# Altium PCB pcb_micro.PcbDoc
Units mm, origin at the board's own origin, x right, y up, seen from the top; angles counter-clockwise.
Board outline 29.72 x 34.04 mm, 2 copper layers (Top Layer, Bottom Layer); 31 components, 26 nets, 131 pads, 15 vias.
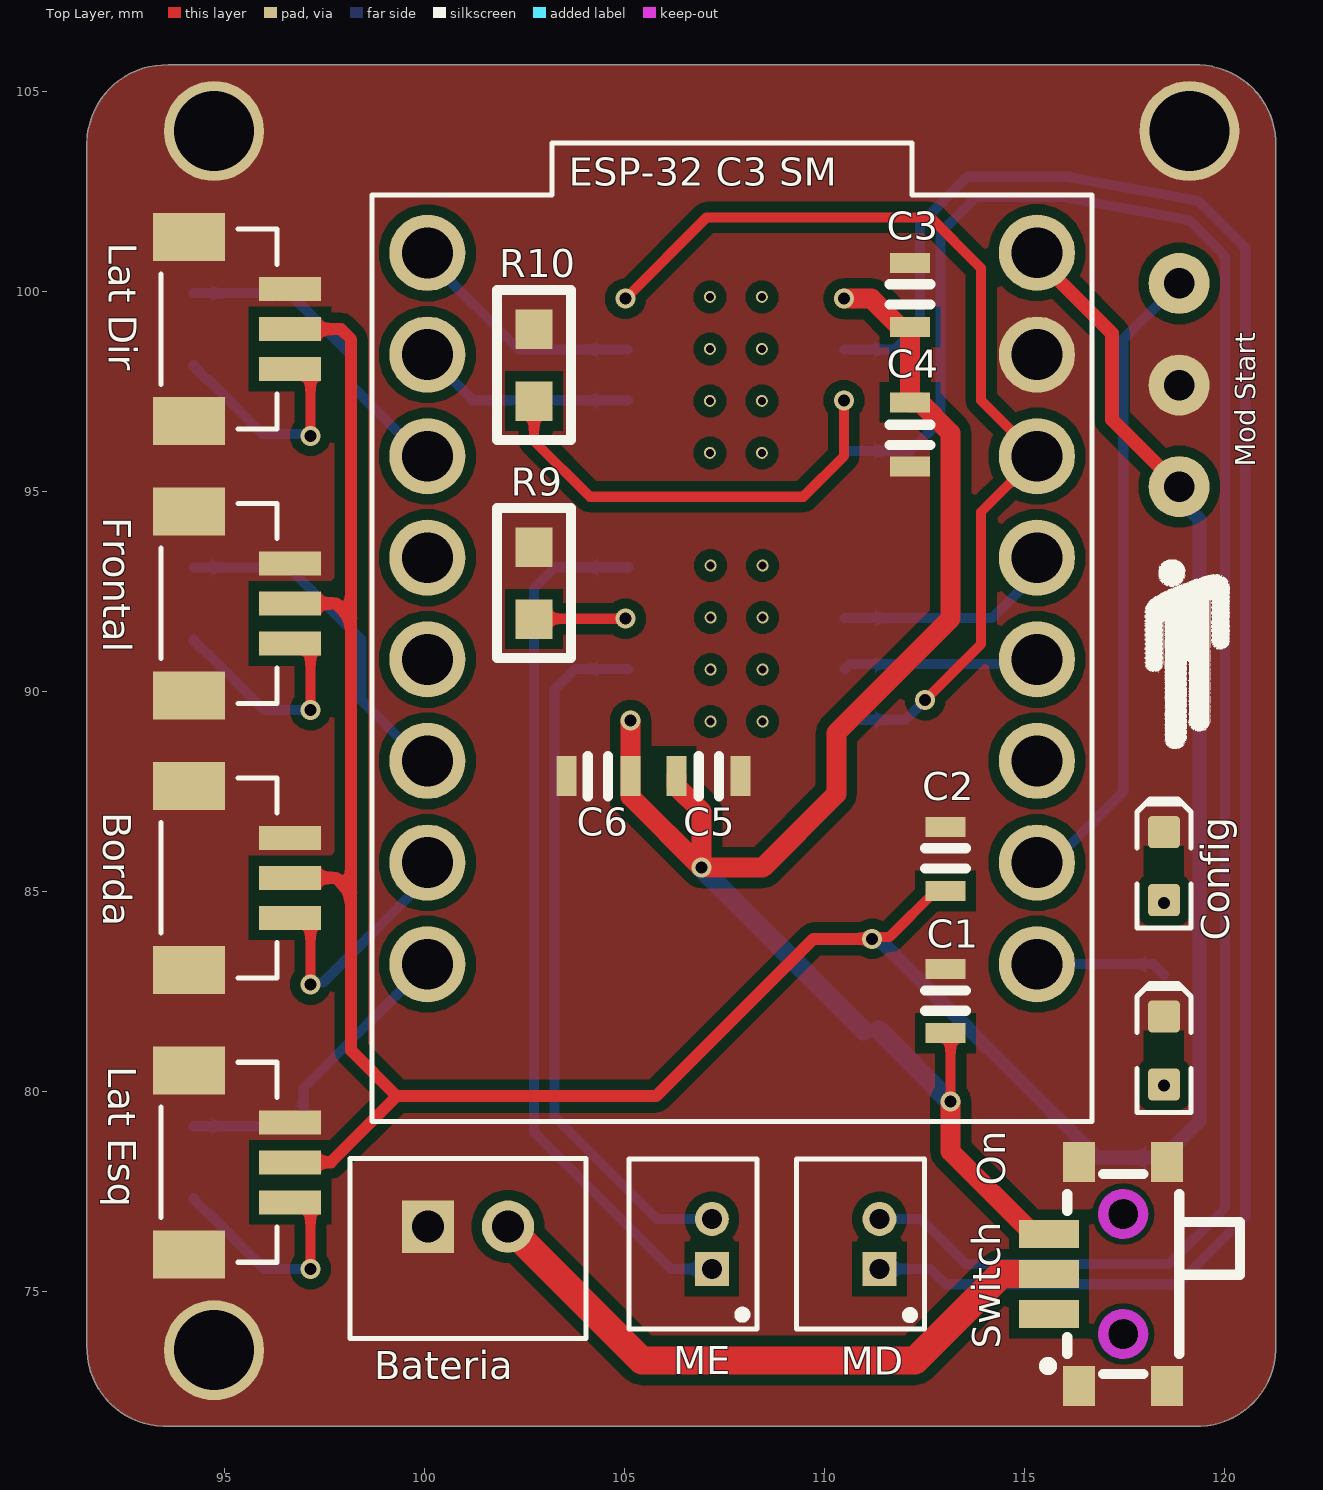
[diagram p0: Top Layer view]
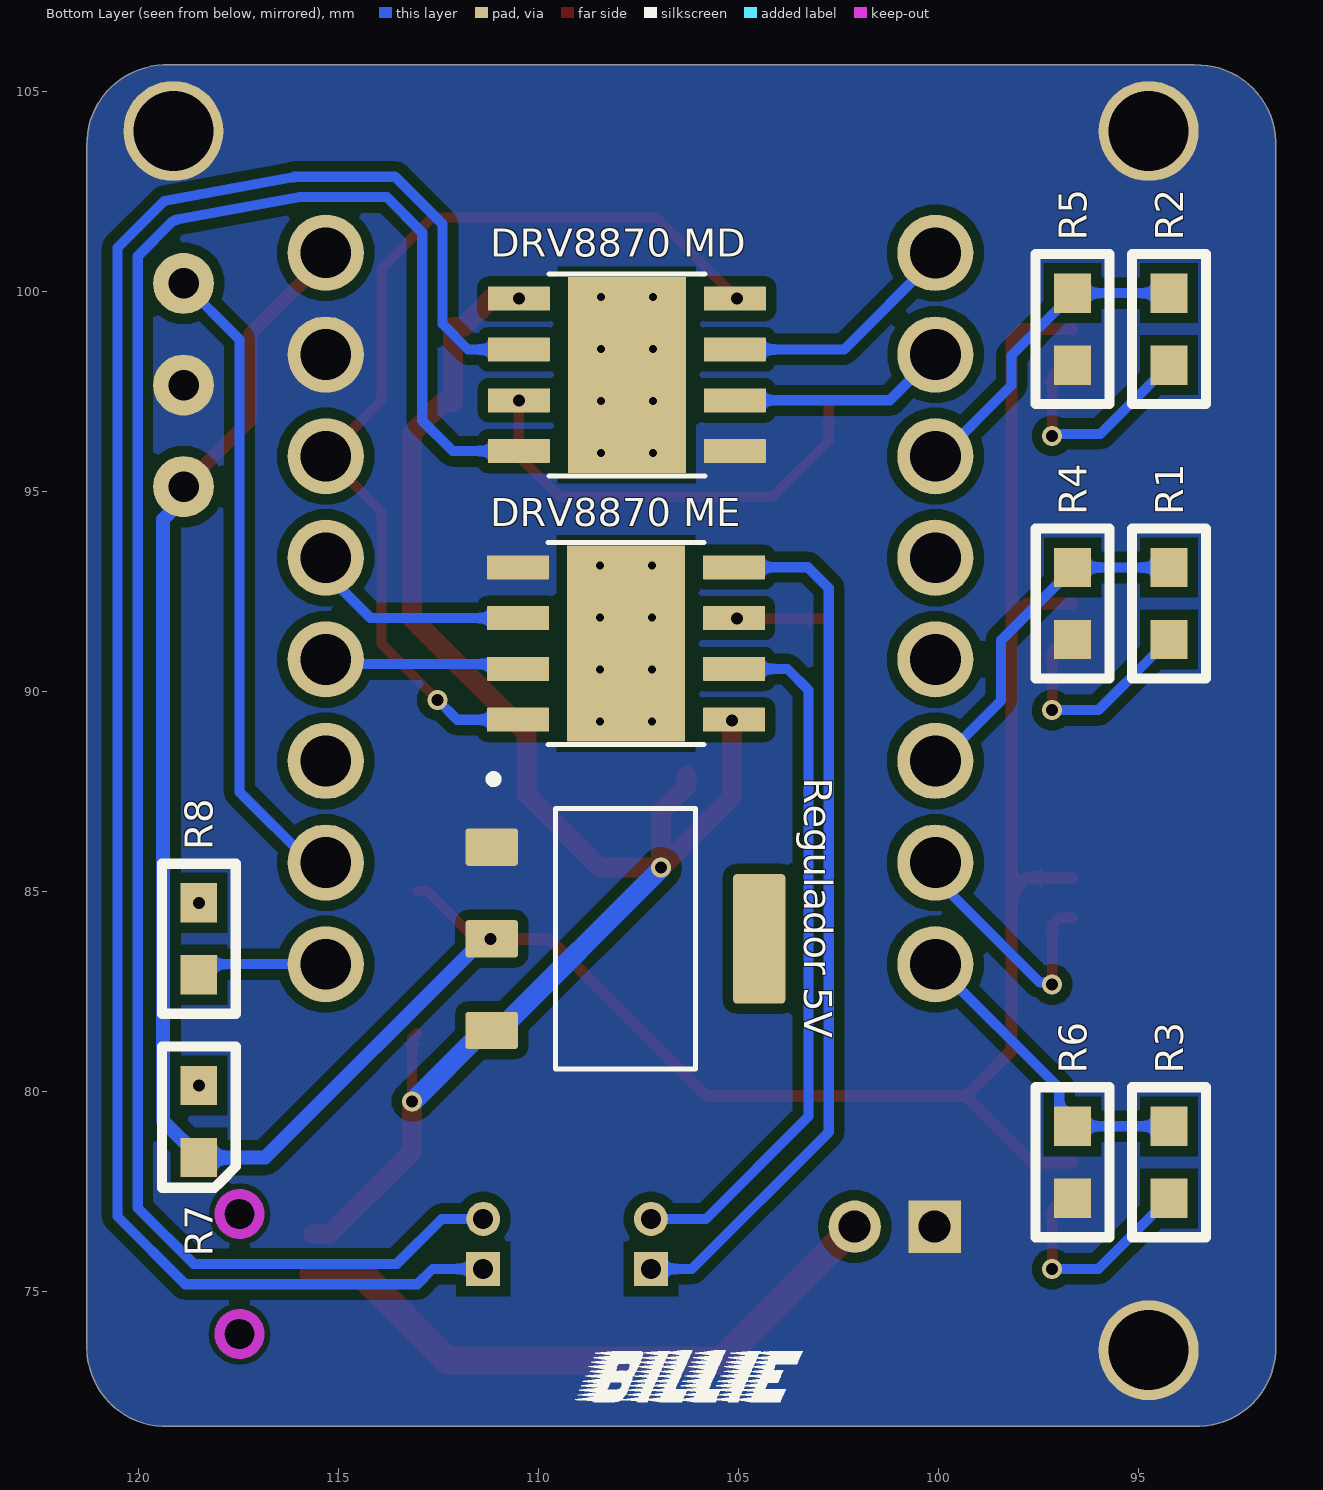
[diagram p1: Bottom Layer view, seen from below]

## Layer stack, top to bottom
Top Solder: solder mask 0.0102, Solder Resist, Dk 3.5
Top Layer: signal copper 0.0356
Dielectric 1: dielectric 0.32, FR-4, Dk 4.8
Bottom Layer: signal copper 0.0356
Bottom Solder: solder mask 0.0102, Solder Resist, Dk 3.5

## Board outline
91.567,73.66 ccw(c93.535,73.596) 93.472,71.628 119.253,71.628 ccw(c119.316,73.596) 121.285,73.533 121.285,103.632 ccw(c119.316,103.696) 119.38,105.664 93.599,105.664 ccw(c93.535,103.696) 91.567,103.759

## Design rules (kind name [scope] priority, off if disabled: settings)
Clearance Clearance_1 [OnMid vs OnMid] p1: gap=0.254 ignorepadtopadclearanceinfootprint=FALSE sourcerule=41 cellrowname=All cellrowtype=0 cellcolname=All cellcoltype=0 innerlayers=TRUE
Clearance Clearance_2 [(ExistsOnLayer('Top Layer') Or ExistsOnLayer('Bottom Layer')) vs (ExistsOnLayer('Top Layer') Or ExistsOnLayer('Bottom Layer'))] p2: gap=0.254 ignorepadtopadclearanceinfootprint=FALSE sourcerule=41 cellrowname=All cellrowtype=0 cellcolname=All cellcoltype=0 outerlayers=TRUE
Clearance [All] p3: gap=0.254 ignorepadtopadclearanceinfootprint=FALSE ismatrix=TRUE
Length MaxMinLength [All] p1: maxlimit=2540 minlimit=0
MinimumSolderMaskSliver [All] p1: minsoldermaskwidth=0.05
PolygonConnect PolygonConnect_4 [All vs IsNamedPolygon('GND_L02_P001')] p1: connectstyle=Direct reliefconductorwidth=0.254 reliefentries=4 polygonreliefangle="90 Angle" airgapwidth=0.254
PolygonConnect PolygonConnect_3 [All vs IsNamedPolygon('GND_L01_P000')] p2: connectstyle=Direct reliefconductorwidth=0.254 reliefentries=4 polygonreliefangle="90 Angle" airgapwidth=0.254
PolygonConnect PolygonConnect_2 [All vs IsNamedPolygon('GND_L01_P000')] p3: connectstyle=Direct reliefconductorwidth=0.254 reliefentries=4 polygonreliefangle="90 Angle" airgapwidth=0.254
PolygonConnect PolygonConnect_1 [All vs IsNamedPolygon('GND_L01_P000')] p4: connectstyle=Direct reliefconductorwidth=0.254 reliefentries=4 polygonreliefangle="90 Angle" airgapwidth=0.254
PolygonConnect [All] p5: connectstyle=Relief reliefconductorwidth=0.254 reliefentries=4 polygonreliefangle="90 Angle" airgapwidth=0.254
RoutingVias [All] p1: holewidth=0.711 width=1.27 viastyle="Through Hole" minholewidth=0.711 minwidth=1.27 maxholewidth=0.711 maxwidth=1.27
SilkToSilkClearance [All] p1: silktosilkclearance=0
SilkToSolderMaskClearance [IsPad] p1: minsilkscreentomaskgap=0 clearancetoexposedcopper=TRUE
SolderMaskExpansion [All] p1: expansion=0.102 istentingtop=FALSE
Width [All] p1: maxlimit=0.8 minlimit=0.254 preferedwidth=0.254 minimp=50.000000 maximp=50.000000 favimp=50.000000
27 further rules are at their usual default settings.

## Components (designator, comment, footprint, x,y, rotation, side; value= is the part's Value field where it differs from the comment)
Bateria "JST PH 2" JST_B2B-PH-K-S(LF)(SN) 101.092,76.073 r180 top
Borda "JST SH 3" JST_BM03B-SRSS-TB(LF)(SN) 94.869,85.344 r90 top
C1 "10uF" CAPC0603 113.03,81.258 r180 top
C2 "22uF" CAPC0603 113.03,84.814 r180 top
C3 "0.1uF" CAPC0603 112.141,98.911 r180 top
C4 "47uF" CAPC0603 112.141,97.431 r0 top
C5 "0.1uF" CAPC0603 106.099,87.884 r90 top
C6 "47uF" CAPC0603 105.356,87.884 r270 top
Config "LED SMD 0603" "LED SMD 0603 Vermelho" 118.491,85.637 r90 top
"DRV8870 MD" "DRV8870DDA" VREG_LM5017MR/NOPB 107.79,97.917 r0 bottom
"DRV8870 ME" "DRV8870DDA" VREG_LM5017MR/NOPB 107.808,91.201 r180 bottom
"ESP-32 C3 SM" "ESP32-C3_SUPERMINI_TH" MODULE_ESP32-C3_SUPERMINI 107.696,91.065 r0 top
Frontal "JST SH 3" JST_BM03B-SRSS-TB(LF)(SN) 94.869,92.202 r90 top
"Lat Dir" "JST SH 3" JST_BM03B-SRSS-TB(LF)(SN) 94.869,99.06 r90 top
"Lat Esq" "JST SH 3" JST_BM03B-SRSS-TB(LF)(SN) 94.872,78.232 r90 top
MD "Molex Picoblade" MOLEX_53047-0210 111.379,76.19 r90 top (schematic designator "Conector MD")
ME "Molex Picoblade" MOLEX_53047-0210 107.188,76.19 r90 top (schematic designator "Conector ME")
"Mod Start" "Header 3" "MicroStart Start Module" 118.872,95.123 r90 top
On "LED SMD 0603" "LED SMD 0603 Vermelho" 118.491,81.026 r90 top
R1 "Resistor SMD" "Resistor SMD 0603" 94.234,92.202 r90 bottom value=10K
R2 "Resistor SMD" "Resistor SMD 0603" 94.234,99.06 r90 bottom value=10K
R3 "Resistor SMD" "Resistor SMD 0603" 94.234,78.232 r90 bottom value=10K
R4 "Resistor SMD" "Resistor SMD 0603" 96.644,92.202 r270 bottom value=20K
R5 "Resistor SMD" "Resistor SMD 0603" 96.647,99.06 r270 bottom value=20K
R6 "Resistor SMD" "Resistor SMD 0603" 96.647,78.232 r270 bottom value=20K
R7 "Resistor SMD" "Resistor SMD 0603" 118.491,79.248 r90 bottom value=220
R8 "Resistor SMD" "Resistor SMD 0603" 118.491,83.82 r90 bottom value=220
R9 "Resistor SMD" "Resistor SMD 0603" 102.743,92.71 r90 top value=0.2
R10 "Resistor SMD" "Resistor SMD 0603" 102.743,98.16 r90 top value=0.2
"Regulador 5V" "AMS1117-5.0" "AMS1117 5V" 107.823,83.82 r270 bottom
Switch "SK-3293S" SW-SMD_SK-3293S 117.094,75.438 r90 top

## Footprints (in the part's own frame and the unit in brackets; to place one, negate y for a bottom-side part, rotate by r counter-clockwise, add the part's x,y. Pads: shape width x height; smd on the part's side, far side on the other; paste and mask are expansions set on the pad)
"AMS1117 5V" [mm]
  rrect15% 0.93x1.31 smd: 1(-2.29,-3.345) 2(0,-3.345) 3(2.29,-3.345)
  rrect15% 3.24x1.31 smd: 4(0,3.345)
  silkscreen extent -4.09,-3.4 3.25,1.75, body extent -3.25,-3.5 3.25,3.5, height 1.8
CAPC0603 [mm]
  rect 1x0.5 smd: 1(0,-0.2) 2(0,-1.8)
  silkscreen extent -0.51,-1.27 0.51,-0.76, body extent -0.45,-1.8 0.45,-0.2, height 0.8
JST_B2B-PH-K-S(LF)(SN) [mm]
  rect 1.308x1.308 / inner round 1.308 / far side rect 1.308x1.308 hole 0.8: 1(1,-0.55)
  round 1.308 hole 0.8: 2(-1,-0.55)
  silkscreen extent -2.95,-2.25 2.95,2.25, body extent -2.95,-2.25 2.95,2.25, height 6
JST_BM03B-SRSS-TB(LF)(SN) [mm]
  rect 0.6x1.55 smd: 1(-1,-1.775) 2(0,-1.775) 3(1,-1.775)
  rect 1.2x1.8 smd: S1(-2.3,0.75) S2(2.3,0.75)
  silkscreen extent -2.5,-1.45 2.5,1.45, body extent -2.5,-2.15 2.5,1.45, height 4.35
"LED SMD 0603 Vermelho" [mm]
  round 0.254 on Mech15: 0(0,0)
  rrect25% 0.8x0.8 smd: A(-0.85,0) K(0.85,0)
  Top Layer pour cut-out: -0.5,0.5 0.5,0.5 0.5,-0.5 -0.5,-0.5
  silkscreen extent -1.55,-0.67 1.68,0.67, body extent -0.8,-0.4 0.8,0.4, height 0.76
"MicroStart Start Module" [mil]
  round 60 hole 30: 1(0,0) 2(100,0) 3(200,0)
MODULE_ESP32-C3_SUPERMINI [mm]
  round 1.905 hole 1.27: 0(7.62,-7.88) 1(7.62,-5.34) 2(7.62,-2.8) 3(7.62,-0.26) 3.3(7.62,4.82) 4(7.62,2.28) 5(-7.62,9.9) 5V(7.62,9.906) 6(-7.62,7.36) 7(-7.62,4.82) 8(-7.62,2.28) 9(-7.62,-0.26) 10(-7.62,-2.8) 20(-7.62,-5.34) 21(-7.62,-7.88) G(7.62,7.36)
  silkscreen extent -9,-11.82 9,12.65, body extent -8.98,-11.3 9.02,12.7, height 12.59
MOLEX_53047-0210 [mm]
  rect 0.85x0.85 / inner round 0.85 / far side rect 0.85x0.85 hole 0.5: 01(-0.625,0)
  round 0.85 hole 0.5: 02(0.625,0)
  silkscreen extent -2.12,-1.12 2.12,2.07
"Resistor SMD 0603" [mm]
  rect 0.98x0.92 smd: 1(-0.9,0) 2(0.9,0)
  silkscreen extent -1.88,-0.92 1.88,0.92, body extent -0.8,-0.4 0.8,0.4, height 0.45
SW-SMD_SK-3293S [mm]
  rect 0.7x1.49 smd: 1(-1,1.477) 2(0,1.477) 3(1,1.477)
  rect 1x0.8 smd: 4(-2.8,-1.478) 4(-2.8,0.723) 4(2.8,-1.478) 4(2.8,0.723)
  Keep-Out Layer board cut-out: 2,-0.377 1.95,-0.161 1.812,0.013 1.611,0.11 1.389,0.11 1.188,0.013 1.049,-0.161 1,-0.377 1,-0.377 1.049,-0.594 1.188,-0.768 1.389,-0.865 1.611,-0.865 1.812,-0.768 1.95,-0.594 2,-0.377
  Keep-Out Layer board cut-out: -1,-0.377 -1.05,-0.161 -1.188,0.013 -1.389,0.11 -1.611,0.11 -1.812,0.013 -1.951,-0.161 -2,-0.377 -2,-0.377 -1.951,-0.594 -1.812,-0.768 -1.611,-0.865 -1.389,-0.865 -1.188,-0.768 -1.05,-0.594 -1,-0.377
  Keep-Out Layer circle w0.254: c1.5,-0.377 r0.5
  Keep-Out Layer circle w0.025: c1.5,-0.377 r0.5
  Keep-Out Layer circle w0.254: c-1.5,-0.377 r0.5
  Keep-Out Layer circle w0.025: c-1.5,-0.377 r0.5
  silkscreen extent -2.5,-3.3 2.5,1.6
VREG_LM5017MR/NOPB [mm]
  rrect5% 1.55x0.6 smd mask+0: 1(-2.7,1.905) 2(-2.7,0.635) 3(-2.7,-0.635) 4(-2.7,-1.905) 5(2.7,-1.905) 6(2.7,-0.635) 7(2.7,0.635) 8(2.7,1.905)
  rect 2.95x4.9 smd paste-3 mask+0: 9(0,0)
  round 0.3 hole 0.2: 10(-0.65,1.95) 11(0.65,1.95) 12(-0.65,0.65) 13(0.65,0.65) 14(-0.65,-0.65) 15(0.65,-0.65) 16(-0.65,-1.95) 17(0.65,-1.95)
  silkscreen extent -1.95,-2.52 1.95,2.52

## Part data
Bateria: library part B2B-PH-K-S(LF)(SN), "Connector Header Through Hole 2 position 0.079 (2.00mm)", Package=None, Check_prices=https://www.snapeda.com/parts/B2B-PH-K-S%20(LF)(SN)/JST/view-part/?ref=eda, MF=JST, MP="B2B-PH-K-S (LF)(SN)", SnapEDA_Link=https://www.snapeda.com/parts/B2B-PH-K-S%20(LF)(SN)/JST/view-part/?ref=snap
Borda Frontal "Lat Dir" "Lat Esq": library part BM03B-SRSS-TB(LF)(SN), "Connector Header Surface Mount 3 position 0.039 (1.00mm)", Package=None, Check_prices=https://www.snapeda.com/parts/BM03B-SRSS-TB(LF)(SN)/JST/view-part/?ref=eda, MF="JST Sales", MP=BM03B-SRSS-TB(LF)(SN), SnapEDA_Link=https://www.snapeda.com/parts/BM03B-SRSS-TB(LF)(SN)/JST/view-part/?ref=snap
C1 C2 C3 C4 C5 C6: library part "Capacitor SMD", "0805 390 pF 50 V Â±5% Tolerance C0G SMT Multilayer Ceramic Capacitor", Package="0805 Murata", Availability=Good, MF="Murata Electronics", MP=GRM2165C1H391JA01D, Price="0.07 USD", SnapEDA_Link=https://www.snapeda.com/parts/GRM2165C1H391JA01D/Murata%2520Electronics%2520North%2520America/view-part/?ref=snap
Config On: "Diodo emissor de luz SMD 0603"
  Config: Cor=Azul
  On: Cor=Verde
"DRV8870 MD" "DRV8870 ME": Package=None, Availability=Unavailable, MP=DRV8870DDA, Price=None
"ESP-32 C3 SM": "Super tiny ESP32-C3 board", Package=Package, Check_prices=https://www.snapeda.com/parts/ESP32-C3%20SuperMini_TH/Espressif+Systems/view-part/?ref=eda, MF="Espressif Systems", MP="ESP32-C3 SuperMini_TH", SnapEDA_Link=https://www.snapeda.com/parts/ESP32-C3%20SuperMini_TH/Espressif+Systems/view-part/?ref=snap
MD ME: library part 53047-0210, "Picoblade Connector, 2 Circuit Single Row, Vertical Throughole PCB", Package=None, Check_prices=https://www.snapeda.com/parts/0530470210/Molex/view-part/?ref=eda, MF=Molex, MP=0530470210, SnapEDA_Link=https://www.snapeda.com/parts/0530470210/Molex/view-part/?ref=snap
"Mod Start": "Header, 3-Pin", LatestRevisionDate=17-Jul-2002, LatestRevisionNote="Re-released for DXP Platform.", Publisher="Altium Limited"
R1 R2 R3 R4 R5 R6 R7 R8 R9 R10: "Resistor SMD com os tamanhos 0603, 0805, 1206 e 1210", Size=0603
"Regulador 5V": "1A LOW DROPOUT VOLTAGE REGULATOR", Package="SOT-223 Seeed Technology", Availability="Not in stock", Check_prices=https://www.snapeda.com/parts/AMS1117-5.0/ams/view-part/?ref=eda, MF=ams, MP=AMS1117-5.0, Price=None, SnapEDA_Link=https://www.snapeda.com/parts/AMS1117-5.0/ams/view-part/?ref=snap
Switch: Actuator Color=White, Current Rating (AC)=50mA, JLCPCB Part Class="Extended Part", LCSC Part Name="柄长1.4mm 卧贴双档 滑动开关", Manufacturer="XKB Connectivity(中国星坤)", Operating Temperature=-40℃~+85℃, Voltage Rating (AC)=12V, Actuator Style="Rectangular columnar", Add into BOM=yes, Circuit=SPDT, Convert to PCB=yes, Current Rating (DC)=50mA, Datasheet=https://atta.szlcsc.com/upload/public/pdf/source/20211011/4EA3EA25F9F21B5CC9E3D39CE49F5B8E.pdf, Device=SK-3293S, Manufacturer Part=SK-3293S, Mechanical Life=1万次, Mounting Style=卧贴, Pin Style=SMDSplicing, Supplier=LCSC, Supplier Footprint=SMD, Supplier Part=C466006, Switch Height=1.4mm, Switch Length=6mm, Switch Width=2.75mm, Symbol=SK-3293S, Voltage Rating (DC)=12V

## Free pads (board coordinates)
  round 2.5 hole 2: 2(94.742,73.533) 2(94.742,104.013) 2(119.126,104.013)

## Via types
v1: diameter 0.5, hole 0.3, Top Layer to Bottom Layer, tented both sides, 15 vias

## Nets (pads, with @x,y where several pads share a name; then routed paths per layer and width w, separated by ;. In a path a pad name is that pad's centre, name@x,y a point inside that pad or via, vN(x,y) a via of type N, cw(c..) or ccw(c..) an arc to the next point about the centre after c; other vN are vias at no path point)
3V3: "DRV8870 MD.4" "DRV8870 ME.4" "ESP-32 C3 SM.3.3" | length 25
  Top Layer w0.254: v1(105.029,99.822) 107.061,101.854 112.649,101.854 113.919,100.584 113.919,97.282 115.316,95.885 113.919,94.488 113.919,91.186 v1(112.522,89.789)
  Bottom Layer w0.254: 110.508,89.296 112.029,89.296 v1(112.522,89.789)
5V: "ESP-32 C3 SM.5V" "Lat Dir.2" "Lat Esq.2" "Mod Start.1" "Regulador 5V.2" Borda.2 C2.1 Frontal.2 R7.1 | length 77.9
  Top Layer w0.254: v1(111.193,83.82) 111.24,83.867 111.633,83.867 112.78,85.014 C2.1 ; 115.316,100.832 115.316,100.971
  Top Layer w0.3: Borda.2 97.79,85.344 98.171,84.963 ; Frontal.2 97.79,92.202 98.171,91.821 ; 96.644,99.06 97.917,99.06 98.171,98.806 98.171,91.821 ; 96.647,78.232 97.663,78.232 99.314,79.883 ; v1(111.193,83.82) 109.728,83.82 105.791,79.883 99.314,79.883 ; 98.171,84.963 98.171,91.821 ; 98.171,84.963 98.171,81.026 99.314,79.883
  Top Layer w0.35: 115.316,100.832 117.194,98.954 117.194,96.801 118.872,95.123
  Bottom Layer w0.35: v1@111.168,83.82 v1(111.193,83.82) 111.358,83.82 116.83,78.348 R7.1 118.491,78.378 119.38,79.267 119.38,94.297 118.872,94.805 118.872,95.123
GND: "DRV8870 MD.1" "DRV8870 ME.1" "ESP-32 C3 SM.G" "Lat Dir.3" "Lat Dir.S1" "Lat Dir.S2" "Lat Esq.3" "Lat Esq.S1" "Lat Esq.S2" "Mod Start.2" "Regulador 5V.1" Bateria.1 Borda.3 Borda.S1 Borda.S2 C1.2 C2.2 C3.2 C4.2 C5.2 C6.2 Config.K Frontal.3 Frontal.S1 Frontal.S2 On.K pad.2 R4.2 R5.2 R6.2 R9.2 R10.2 Switch.4
LED: "ESP-32 C3 SM.0" R8.1 | length 3.3
  Bottom Layer w0.254: 115.316,83.185 118.226,83.185 R8.1
MOD_START: "ESP-32 C3 SM.1" "Mod Start.3" | length 16.2
  Bottom Layer w0.254: 115.316,85.725 115.703,85.725 117.475,87.497 117.475,98.806 118.872,100.203
MOTOR_DIR_IN1: "DRV8870 MD.3" "ESP-32 C3 SM.5" | length 6.1
  Bottom Layer w0.254: 100.076,100.965 100.076,100.832 102.356,98.552 105.09,98.552
MOTOR_DIR_IN2: "DRV8870 MD.2" "ESP-32 C3 SM.6" | length 5.5
  Bottom Layer w0.254: 100.076,98.425 101.206,97.295 101.206,97.282 105.09,97.282
MOTOR_DIR_OUT1: "DRV8870 MD.6" MD.01 | length 48
  Bottom Layer w0.254: 110.49,98.552 111.76,98.552 112.395,99.187 112.395,101.683 113.582,102.87 116.112,102.87 ; MD.01 112.649,75.565 113.03,75.184 118.828,75.184 120.523,76.879 120.523,101.097 119.359,102.261 116.112,102.859
MOTOR_DIR_OUT2: "DRV8870 MD.8" MD.02 | length 48.8
  Bottom Layer w0.254: 110.49,96.012 112.141,96.012 112.903,96.774 112.903,101.473 113.792,102.362 115.969,102.362 119.042,101.796 ; MD.02 112.415,76.815 113.538,75.692 118.618,75.692 120.015,77.089 120.015,100.886 119.175,101.726 ccw(c118.996,101.546) 119.043,101.796
MOTOR_ESQ_IN1: "DRV8870 ME.3" "ESP-32 C3 SM.3" | length 4.9
  Bottom Layer w0.254: 110.518,90.556 110.508,90.566 110.627,90.686 115.197,90.686 115.316,90.805
MOTOR_ESQ_IN2: "DRV8870 ME.2" "ESP-32 C3 SM.4" | length 5.7
  Bottom Layer w0.254: 110.508,91.836 114.194,91.836 115.316,92.958 115.316,93.345
MOTOR_ESQ_OUT1: "DRV8870 ME.8" ME.01 | length 22
  Bottom Layer w0.254: 105.108,93.106 103.266,93.106 102.743,92.583 102.743,78.985 106.163,75.565 ME.01
MOTOR_ESQ_OUT2: "DRV8870 ME.6" ME.02 | length 17.7
  Bottom Layer w0.254: 105.108,90.566 103.774,90.566 103.251,90.043 103.251,79.375 105.811,76.815 ME.02
NetBateria_2: Bateria.2 Switch.2 | length 15.8
  Top Layer w0.7: Bateria.2 105.436,73.279 112.268,73.279 114.427,75.438 Switch.2
NetConfig_A: Config.A R8.2
  other v1: 118.491,84.72
"NetDRV8870 MD_7": "DRV8870 MD.7" R10.1 | length 11.1
  Top Layer w0.254: R10.1 102.743,96.266 104.14,94.869 109.474,94.869 110.49,95.885 v1(110.49,97.282)
"NetDRV8870 ME_7": "DRV8870 ME.7" R9.1 | length 2.3
  Top Layer w0.254: R9.1 102.754,91.821 v1(105.029,91.821)
NetFrontal_1: Frontal.1 R1.1 | length 5.7
  Top Layer w0.254: Frontal.1 96.982,91.202 97.155,91.029 v1(97.155,89.535)
  Bottom Layer w0.254: R1.1 94.234,91.272 94.567,90.939 94.597,90.939 96.001,89.535 v1(97.155,89.535)
"NetLat Dir_1": "Lat Dir.1" R2.1 | length 5.7
  Top Layer w0.254: 96.644,98.06 96.982,98.06 97.155,97.887 v1(97.155,96.393)
  Bottom Layer w0.254: R2.1 94.234,98.13 94.567,97.797 94.597,97.797 95.954,96.44 97.108,96.44 v1(97.155,96.393)
"NetLat Esq_1": "Lat Esq.1" R3.1 | length 5.7
  Top Layer w0.254: 96.647,77.232 96.982,77.232 97.155,77.059 v1(97.155,75.565)
  Bottom Layer w0.254: R3.1 94.234,77.302 94.567,76.969 94.597,76.969 96.001,75.565 v1(97.155,75.565)
NetOn_A: On.A R7.2
  other v1: 118.491,80.148
SENSOR_B: "ESP-32 C3 SM.20" Borda.1 | length 6.5
  Top Layer w0.254: Borda.1 96.982,84.344 97.155,84.171 v1(97.155,82.677)
  Bottom Layer w0.254: v1(97.155,82.677) 97.202,82.724 97.462,82.724 100.076,85.338 100.076,85.725
SENSOR_F: "ESP-32 C3 SM.10" R1.2 R4.1 | length 8.7
  Bottom Layer w0.254: R1.2 R4.1 96.644,93.072 98.432,91.284 98.432,89.776 99.943,88.265 100.076,88.265
SENSOR_LD: "ESP-32 C3 SM.7" R2.2 R5.1 | length 8
  Bottom Layer w0.254: R2.2 R5.1 96.647,99.93 98.171,98.406 98.171,97.657 99.943,95.885 100.076,95.885
SENSOR_LE: "ESP-32 C3 SM.21" R3.2 R6.1 | length 7.9
  Bottom Layer w0.254: R3.2 R6.1 96.98,79.465 96.98,80.089 100.076,83.185
VBat: "DRV8870 MD.5" "DRV8870 ME.5" "Regulador 5V.3" C1.1 C3.1 C4.1 C5.1 C6.1 Switch.3 | length 41.4
  Top Layer w0.254: C1.1 113.034,81.458 113.157,81.335 v1(113.157,79.756)
  Top Layer w0.5: v1(105.156,89.281) 105.156,87.376 v1(106.934,85.598) ; C5.1 106.299,87.634 106.934,86.999 v1(106.934,85.598) ; v1(110.49,99.822) 111.18,99.822 111.891,99.111 C3.1 C4.1 112.391,97.231 113.157,96.465 113.157,91.821 110.299,88.963 110.299,87.439 108.458,85.598 v1(106.934,85.598) ; v1(113.157,79.756) 113.157,78.503 115.222,76.438 Switch.3
  Bottom Layer w0.254: 110.978,81.53 111.168,81.53 111.358,81.53 ; v1@113.132,79.756 v1(113.157,79.756)
  Bottom Layer w0.5: v1(106.934,85.598) 106.934,85.574 110.978,81.53 ; 111.358,81.53 v1@113.132,79.756
pads on no net: "DRV8870 MD.9" "DRV8870 MD.10" "DRV8870 MD.11" "DRV8870 MD.12" "DRV8870 MD.13" "DRV8870 MD.14" "DRV8870 MD.15" "DRV8870 MD.16" "DRV8870 MD.17" "DRV8870 ME.9" "DRV8870 ME.10" "DRV8870 ME.11" "DRV8870 ME.12" "DRV8870 ME.13" "DRV8870 ME.14" "DRV8870 ME.15" "DRV8870 ME.16" "DRV8870 ME.17" "ESP-32 C3 SM.2" "ESP-32 C3 SM.8" "ESP-32 C3 SM.9" "Regulador 5V.4" Config.0 On.0 Switch.1

## Polygon pours and split planes (outlines as drawn)
GND on Top Layer "GND_L01_P000" (solid, pour order 0): 91.567,73.66 ccw(c93.535,73.596) 93.472,71.628 119.253,71.628 ccw(c119.316,73.596) 121.285,73.533 121.285,103.632 ccw(c119.316,103.696) 119.38,105.664 93.599,105.664 ccw(c93.535,103.696) 91.567,103.759
GND on Bottom Layer "GND_L02_P001" (solid, pour order 1): 91.567,73.66 ccw(c93.535,73.596) 93.472,71.628 119.253,71.628 ccw(c119.316,73.596) 121.285,73.533 121.285,103.632 ccw(c119.316,103.696) 119.38,105.664 93.599,105.664 ccw(c93.535,103.696) 91.567,103.759

## Silkscreen, mask and mechanical layers (free items; w line width, h text height)
Top Overlay:
  drawing of 16 lines, arcs and shapes, not listed
Bottom Overlay:
  region: 925 vertices and 36 holes, not listed, extent 103.394,72.23 109.083,73.532